# EAGLE board Glove-WiFi-M0-v0.2_pcb_opt (EAGLE 7.5.0)
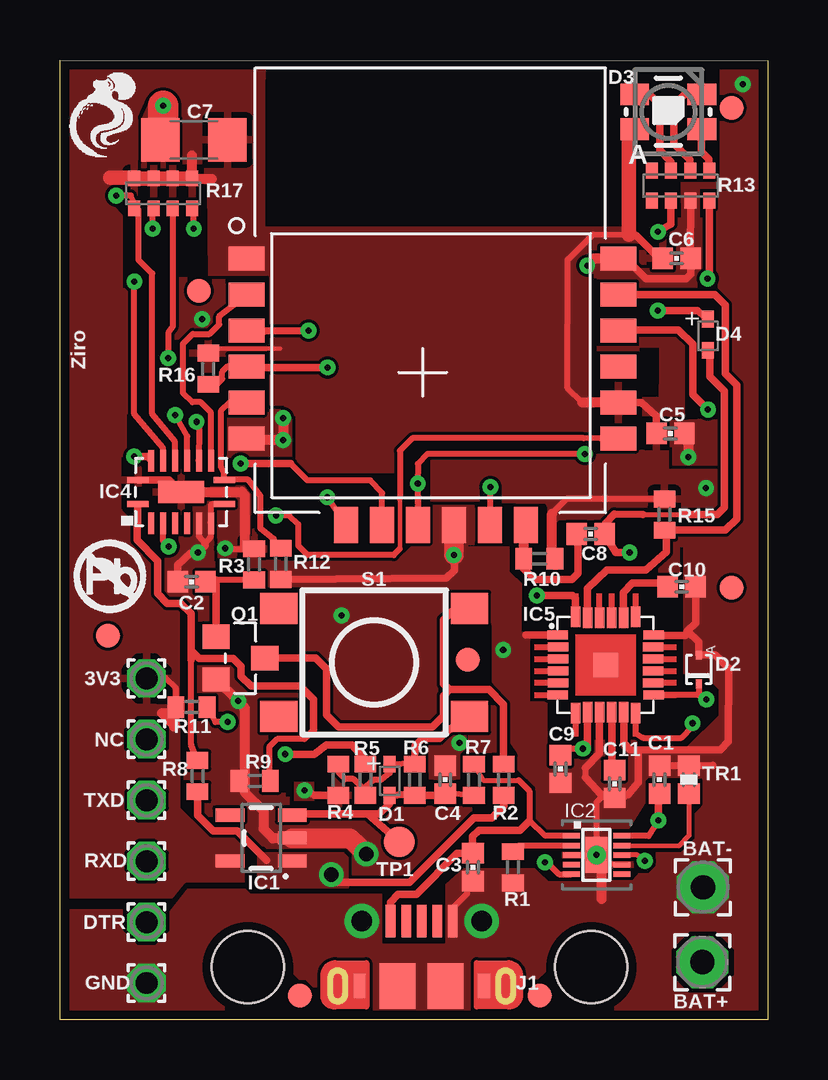
[diagram p0: board, top side]
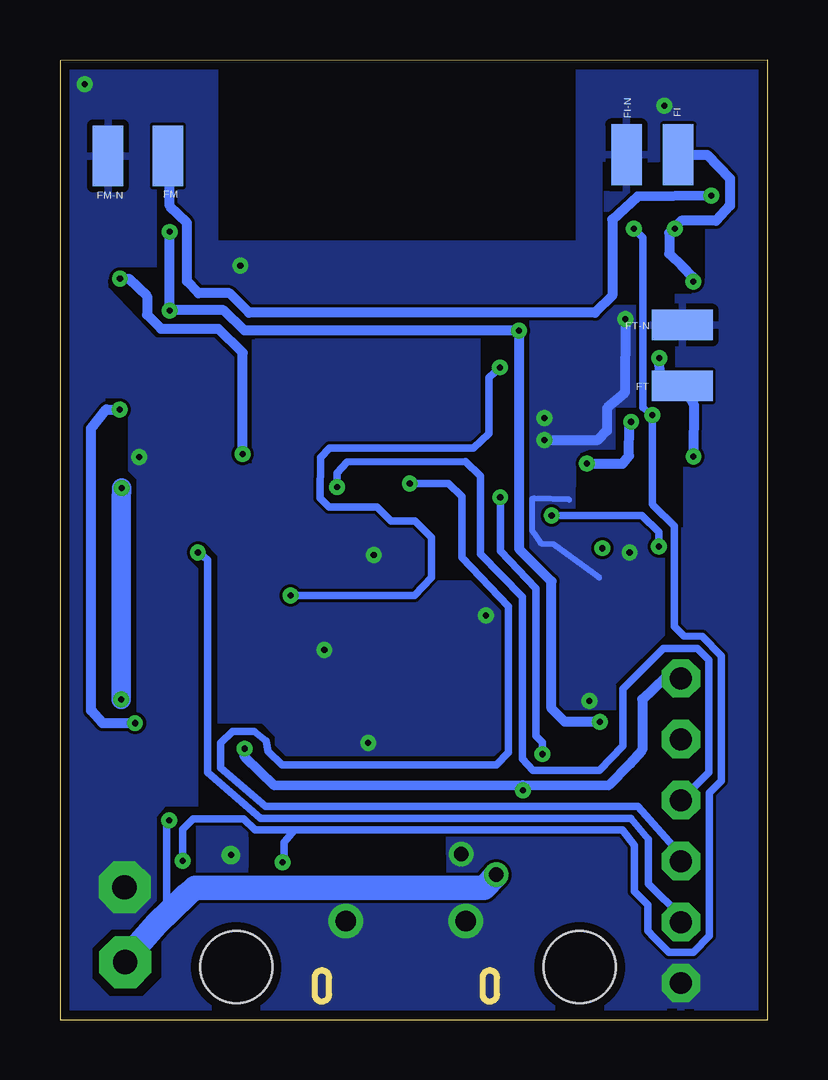
[diagram p1: board, bottom side, seen from below]

Size 29.5 x 40 mm. Coordinates in mm from the lower left corner, seen from the top.
Outline: 29.5,39.98 29.5,0 0,0 0,40 29.5,39.98
Copper layers (1*16): Top 0.035559375mm / dielectric 1.501140625mm / Bottom 0.035559375mm
Design rules "4pcb *": minimum track width 6mil, minimum drill 10mil, track to track 5mil, track to pad 5mil, pad to pad 5mil, via to via 5mil, smd to smd 5mil, copper to edge 15mil, drill to drill 8mil, minimum pad ring 10mil, minimum via ring 8mil, stop-mask expansion 4mil, vias tented up to drill 0mil, thermal gap 10mil
Holes 3 mm at 7.83,2.18 22.15,2.18
tKeepout: area 4.8,-0.8 to 10.8,5.2; area 19.1,-0.9 to 25.1,5.1
tRestrict: area 24.3,16.2 to 25.8,17.4; area 25.9,16.2 to 26,19.7; area 24.2,26.5 to 25,28; area 24,26 to 25,26.7; area 19.3,16.3 to 21.2,17.2; area 24.4,12.5 to 25.9,13.2; area 25.7,11.9 to 25.9,13.2; area 25.4,11.9 to 25.7,12; area 10.6,22.6 to 14,22.8; area 8.6,29.1 to 8.7,29.8; area 8.6,28.1 to 8.7,28.3; area 8.6,27.6 to 8.7,27.9; 20 more areas; 150 lines
bRestrict: area 13,18.3 to 13.7,19.8; area 12.4,18.3 to 12.9,18.6; area 8,32.5 to 22.9,39.8; 69 lines

## Footprints (pad centres in the part's own frame; a part is rotated, then mirrored left to right if it is on the bottom)
1,6/0,9 = drill 0.914 pad 1.6 octagon: 1 0,0
2,15/1,0 = drill 1.016 pad 2.159 octagon: 1 0,0
0402-CAP = smd 0.85 x 0.9: 1 -0.58,0; 2 0.58,0
1206 = smd 1.6 x 1.8: 1 -1.4,0; 2 1.4,0
SOD523 = smd 0.7 x 0.5: A 0.7,0; C -0.6,0
SOD-923 = smd 0.36 x 0.25: A -0.6,0; C 0.6,0
LED_RGB = smd 1.2 x 0.9: 1-RED 1.4,-0.725; 2-CA -1.4,-0.725; 3-BL -1.4,0.725; 4-GR 1.4,0.725
FIDUCIAL-1X2 = smd 1 x 1: 1 0,0
SMD1,27-2,54 = smd 1.27 x 2.54: 1 0,0
SOT23-5 = smd 0.55 x 1.2: 1 -0.95,-1.3; 2 0,-1.3; 3 0.95,-1.3; 4 0.95,1.3; 5 -0.95,1.3
BQ24040DSQR = smd 0.7 x 0.23: 1 -1.05,0.8; 2 -1.05,0.4; 3 -1.05,0; 4 -1.05,-0.4; 5 -1.05,-0.8; 6 1.05,-0.8; 7 1.05,-0.4; 8 1.05,0; 9 1.05,0.4; 10 1.05,0.8 | smd 0.914 x 1.499: 11 0,0 | drill 0.254 pad 0.508: V 0,0
WT8266 = smd 1.5 x 1: 1 -7.35,4.75; 2 -7.35,3.25; 3 -7.35,1.75; 4 -7.35,0.25; 5 -7.35,-1.25; 6 -7.35,-2.75; 13 8.15,-2.75; 14 8.15,-1.25; 15 8.15,0.25; 16 8.15,1.75; 17 8.15,3.25; 18 8.15,4.75 | smd 1 x 1.5: 7 -3.2,-6.35; 8 -1.7,-6.35; 9 -0.2,-6.35; 10 1.3,-6.35; 11 2.8,-6.35; 12 4.3,-6.35
DHVQFN16 = smd 0.24 x 0.9: 1 -0.5,1.8; 8 -0.5,-1.8; 9 0.5,-1.8; 16 0.5,1.8 | smd 0.9 x 0.24: 2 -1.3,1.25; 3 -1.3,0.75; 4 -1.3,0.25; 5 -1.3,-0.25; 6 -1.3,-0.75; 7 -1.3,-1.25; 10 1.3,-1.25; 11 1.3,-0.75; 12 1.3,-0.25; 13 1.3,0.25; 14 1.3,0.75; 15 1.3,1.25 | smd 0.9 x 1.9: EPAD 0,0
QFN.24.4X4 = smd 0.85 x 0.38: 1 -2.007,1.25; 2 -1.975,0.75; 3 -1.975,0.25; 4 -1.975,-0.25; 5 -1.975,-0.75; 6 -2.007,-1.25; 13 2.007,-1.25; 14 1.975,-0.75; 15 1.975,-0.25; 16 1.975,0.25; 17 1.975,0.75; 18 2.007,1.25 | smd 0.38 x 0.85: 7 -1.25,-2.007; 8 -0.75,-1.975; 9 -0.25,-1.975; 10 0.25,-1.975; 11 0.75,-1.975; 12 1.25,-2.007; 19 1.25,2.007; 20 0.75,1.975; 21 0.25,1.975; 22 -0.25,1.975; 23 -0.75,1.975; 24 -1.25,2.007 | smd 1.016 x 1.016: EPAD 0,0
USB-MICRO-MOLEX-105017-0001 = smd 0.4 x 1.35: 1 -1.3,1.3; 2 -0.65,1.3; 3 0,1.3; 4 0.65,1.3; 5 1.3,1.3 | drill 0.85 pad 1.45: G1 -2.5,1.3; G2 2.5,1.3 | smd 1.5 x 1.9: G3 1,-1.4; G4 -1,-1.4 | smd 0.5 x 1: G5 -2.6,-1.4; G6 2.6,-1.4
SOT-23 = smd 1.016 x 1.143: 1 -0.889,-1.016; 2 0.889,-1.016; 3 0,1.016
R0402 = smd 0.7 x 0.9: 1 -0.65,0; 2 0.65,0
0603-ARV = smd 0.5 x 0.65: 1 -1.2,-0.625; 2 -0.4,-0.625; 3 0.4,-0.625; 4 1.2,-0.625; 5 1.2,0.625; 6 0.4,0.625; 7 -0.4,0.625; 8 -1.2,0.625
TACTILE_SWITCH_TALL = smd 1.55 x 1.3: A1 -3.975,-2.25; A2 3.975,-2.25; B1 -3.975,2.25; B2 3.975,2.25
B1,27 = smd 1.27 x 1.27: TP 0,0
0402-RES = smd 0.85 x 0.9: 1 -0.58,0; 2 0.58,0

## Placement (x,y rotation side)
3V3  WIREPAD1,6/0,9  [1,6/0,9]  3.61,14.22 0 top
BAT+  WIREPAD2,15/1,0  [2,15/1,0]  26.78,2.39 90 top
BAT-  WIREPAD2,15/1,0  [2,15/1,0]  26.81,5.51 90 top
C1  10uF  [0402-CAP]  24.99,10 90 top
C2  10uF  [0402-CAP]  5.49,18.25 180 top
C3  0.1uF  [0402-CAP]  17.22,6.35 270 top
C4  10uF  [0402-CAP]  16.06,10 90 top
C5  0.1uF  [0402-CAP]  25.45,24.43 0 top
C6  10uF  [0402-CAP]  25.71,31.73 0 top
C7  100u  [1206]  5.58,36.67 180 top
C8  0.1uF  [0402-CAP]  22.12,20.24 0 top
C9  10nF  [0402-CAP]  20.86,10.44 270 top
C10  2.2nF  [0402-CAP]  25.92,18.04 0 top
C11  0.1uF  [0402-CAP]  23.12,9.82 270 top
D1  PMEG3005EB  [SOD523]  13.75,9.95 90 top
D2  ESD9X5  [SOD-923]  26.63,14.59 270 top
D3  [LED_RGB]  25.36,37.84 0 top
D4  PMEG3005EB  [SOD523]  27.02,28.5 90 top
DTR  WIREPAD1,6/0,9  [1,6/0,9]  3.61,4.06 0 top
FD1  FIDUCIAL1X2  [FIDUCIAL-1X2]  28,18 0 top
FD2  FIDUCIAL1X2  [FIDUCIAL-1X2]  10,1 0 top
FD3  FIDUCIAL1X2  [FIDUCIAL-1X2]  5.8,30.38 0 top
FD4  FIDUCIAL1X2  [FIDUCIAL-1X2]  28,38 0 top
FD5  FIDUCIAL1X2  [FIDUCIAL-1X2]  20,1 0 top
FD6  FIDUCIAL1X2  [FIDUCIAL-1X2]  17,15 0 top
FD8  FIDUCIAL1X2  [FIDUCIAL-1X2]  2,16 0 top
FI  WIREPADSMD1,27-254  [SMD1,27-2,54]  3.72,36.05 0 bottom
FI-N  WIREPADSMD1,27-254  [SMD1,27-2,54]  5.88,36.05 0 bottom
FM  WIREPADSMD1,27-254  [SMD1,27-2,54]  25,36 0 bottom
FM-N  WIREPADSMD1,27-254  [SMD1,27-2,54]  27.5,36 0 bottom
FT  WIREPADSMD1,27-254  [SMD1,27-2,54]  3.56,26.41 270 bottom
FT-N  WIREPADSMD1,27-254  [SMD1,27-2,54]  3.56,28.95 90 bottom
GND  WIREPAD1,6/0,9  [1,6/0,9]  3.61,1.52 0 top
IC1  AP2112K-3.3V  [SOT23-5]  8.39,7.57 90 top
IC2  BQ24040DSQR_BMS  [BQ24040DSQR]  22.37,6.86 0 top
IC3  WT8266  [WT8266]  15.12,26.97 0 top
IC4  74HC4051  [DHVQFN16]  5.05,21.99 90 top
IC5  MPU-6050  [QFN.24.4X4]  22.75,14.78 0 top
J1  Micro-USB  [USB-MICRO-MOLEX-105017-0001]  15.08,2.8 0 top
NC  WIREPAD1,6/0,9  [1,6/0,9]  3.61,11.68 0 top
Q1  2N7002-NMOS  [SOT-23]  7.53,15.06 270 top
R1  3k  [R0402]  18.89,6.35 90 top
R2  30k  [R0402]  18.5,10 270 top
R3  300k  [R0402]  8.09,18.97 90 top
R4  300k  [R0402]  11.61,10 90 top
R5  3k  [R0402]  12.74,10 90 top
R6  300k  [R0402]  14.79,10 90 top
R7  300k  [R0402]  17.26,10 270 top
R8  30k  [R0402]  5.74,10.15 270 top
R9  3k  [R0402]  8.12,9.95 0 top
R10  30k  [R0402]  19.98,19.21 0 top
R11  3k  [R0402]  5.49,13.03 180 top
R12  3k  [R0402]  9.21,19 90 top
R13  330E  [0603-ARV]  25.87,34.76 180 top
R15  3k  [R0402]  25.2,21.05 90 top
R16  3k  [R0402]  6.18,27.13 90 top
R17  300k  [0603-ARV]  4.3,34.43 0 top
RXD  WIREPAD1,6/0,9  [1,6/0,9]  3.61,6.6 0 top
S1  On/Off Sw  [TACTILE_SWITCH_TALL]  13.1,14.89 0 top
TP1  PTR1B1,27  [B1,27]  14.15,7.4 90 top
TR1  10kNTC  [0402-RES]  26.22,10 90 top
TXD  WIREPAD1,6/0,9  [1,6/0,9]  3.61,9.14 0 top
U$2  [NO_PB_LOGO_0.120]  0.36,16.58 0 top

## Library data of the parts
3V3 BAT+ BAT- DTR FI FI-N FM FM-N FT FT-N GND NC RXD TXD = wirepad
C1-C6 C8-C11 = 1_ZeroUI; PROD_ID: CAP-12416
C7 R13 R17 = SparkFun-Passives
D1 D4 = diode
D2 D3 IC3-IC5 J1 TR1 U$2 = 1_ZeroUI
FD1-FD6 FD8 = SparkFun-Aesthetics
IC1 = SparkFun-PowerIC; PROD_ID: VREG-12457
IC2 = 1_ZeroUI; 3D_LIBRARY_NAME: TI_AllParts_2012-12-25; COPYRIGHT: Copyright (C) 2015 Accelerated Designs. All rights reserved; DATASHEETURL: http://www.ti.com/lit/gpn/BQ24040; FAMILY_NAME: BATTERY CHARGE MANAGEMENT; GENERIC_PART_NUMBER: BQ24040; INDUSTRY_STD_PKG_TYPE: SON; MANUFACTURER: Texas Instruments; MANUFACTURER_PART_NUMBER: BQ24040DSQR; PACKAGE_DESIGNATOR: DSQ; PIN_COUNT: 10; VENDOR: Vendor
Q1 = 1_ZeroUI; MPN: 2N7002,215
R1-R12 R15 R16 = rcl
S1 = 1_ZeroUI; PROD_ID: SWCH-11966
TP1 = testpad

## Nets
3.3V: 3V3.1 C5.1 C6.1 C7.1 C9.1 D2.C D3.2-CA IC1.5 IC3.1 IC3.14 IC4.16 IC4.EPAD IC5.8 IC5.13 R3.2 R4.1 R10.2 R11.2 R15.2 R16.2 R17.5 R17.6 R17.7 R17.8
5V: C3.1 IC2.1 J1.1 R7.1
/POWEROFF_SWINT: IC3.7 R5.2
CHG_ON: IC2.5 IC2.8 IC4.12 R17.4
DTR: C8.2 D4.C DTR.1
GND: BAT-.1 C1.2 C2.2 C3.2 C4.2 C5.2 C6.2 C7.2 C9.2 C10.2 C11.2 D2.A FI-N.1 FM-N.1 FT-N.1 GND.1 IC1.2 IC2.3 IC2.7 IC2.11 IC2.V IC3.6 IC3.10 IC3.18 IC4.6 IC4.7 IC4.8 IC5.1 IC5.9 IC5.11 IC5.18 J1.5 J1.G1 J1.G2 J1.G3 J1.G4 J1.G5 J1.G6 Q1.2 R1.1 R9.1 R12.1 R13.7 TR1.2
I2C_N: IC3.4 IC5.24 R16.1
I2C_P: IC3.17 IC5.23 R15.1
MPU_INT: IC3.16 IC5.12
MUX_COM: IC3.13 IC4.3
MUX_S0: IC3.8 IC4.11
MUX_S1: IC3.2 IC4.10
MUX_S2: IC3.5 IC4.9 R12.2
N$1: FT.1 IC4.15 R17.3
N$2: C11.1 IC5.10
N$3: C10.1 IC5.20
N$4: FI.1 IC4.14 R17.2
N$5: FM.1 IC4.13 R17.1
N$6: D3.1-RED R13.1
N$7: D3.4-GR R13.2
N$8: D3.3-BL R13.3
N$9: C2.1 Q1.1 R3.1
N$10: IC2.2 R1.2
N$11: Q1.3 R2.1 S1.B2
N$12: D1.A R4.2 R5.1 R6.2 S1.A2
N$13: IC2.9 TR1.1
PROGL/LED-B: D4.A IC3.3 R11.1 R13.6
PWR_EN: C4.1 D1.C IC1.3 R6.1 R7.2 TP1.TP
RST: C8.1 IC3.12 R10.1
RXD/LED-R: IC3.9 R13.8 RXD.1
TXD: IC3.11 TXD.1
V_BATT: BAT+.1 C1.1 IC1.1 IC2.10 R2.2 R8.2
VBATT_SENSE: IC4.1 R8.1 R9.2

## Tracks (layer width: path | path; a pad name or v marks a point on that pad's centre or on a via)
3.3V  (via drill 0.25)
  Top 0.178: 6.35,27.97 9.18,27.97
  Top 0.254: 20.51,19.32 R10.2 20.67,19.22 20.57,19.23 | 20.51,21.09 21.14,21.71 R15.2 25.34,21.84 | 21.77,25.72 21.17,26.33 21.18,31.68 22.24,32.73 23.72,32.73 | 26.63,13.94 D2.C 26.63,13.53 | v26.95,13.35 26.63,13.53 | 26.63,13.53 IC5.13 | 21.98,12.69 IC5.8 | R11.2 4.84,13.82 4.41,14.25 3.64,14.25 3V3.1 | v6.89,19.65 6.88,19.62 R3.2 7.71,19.72 | IC3.1 7.58,31.72 7.77,31.76 | v21.81,11.29 21.14,11.29 C9.1 | R16.2 6.35,27.97
  Top 0.305: C6.1 25.12,31.59 24.02,32.68 23.72,32.73 | 23.72,37.13 D3.2-CA | 24.62,24.47 24.86,24.65 24.86,25.16 24.23,25.72 IC3.14 | 21.98,12.69 21.98,11.43 v21.81,11.29 | IC4.16 4.55,22.49 IC4.EPAD | v10.2,9.55 10.62,9.35 R4.1
  Top 0.406: 20.51,19.32 20.51,21.09 | IC3.14 21.77,25.72 | IC4.EPAD 7.59,21.99 7.7,21.85 7.71,19.72 | 6.34,35.05 R17.5 5.5,36.02 | R11.2 4.75,13.03 4.75,12.27 | 4.75,12.22 4.75,12.27 | 4.75,12.27 4.24,12.78 4.55,12.78 4.62,12.85
  Top 0.61: 23.72,32.73 23.72,37.13 | R17.5 R17.6 R17.7 R17.8 3.23,35.1 2.1,35.1
  Bottom 0.254: 3.64,14.25 3V3.1 3.6,14.21
  Bottom 0.406: 3.64,14.25 4.28,14.25 5.23,13.35 5.23,11.24 5.77,10.63 6.63,9.76 10.2,9.78 | 10.2,9.78 20.57,9.77 21.8,10.95 v21.81,11.29 | v10.2,9.55 10.2,9.78
  Bottom 0.813: v26.95,13.35 26.94,21.65 v26.93,22.16
  pour Top (rank 3): 15.01,5.84 15.04,11.45 8.95,11.45 8.98,20.15 29.58,20.15 29.58,33.15 8.95,33.15 8.95,39.86 -0.17,39.81 -0.17,4.93 4.45,4.98 5.16,5.84
  pour Top (rank 2, no thermals): 5.7,7.55 5.7,5.98 8.85,5.98 8.85,7.55
  pour Top (no thermals): 5.83,32.82 5.83,31.07 8.98,31.07 8.98,32.82
  pour Top (no thermals): 0.42,39.6 0.42,34.6 1.36,34.6 4.42,37.66 4.42,39.6
5V
  Top 0.203: 17.26,10.6 17.65,9.97 19.13,9.97
  Top 0.254: IC2.1 20.23,7.66 19.57,8.29 19.57,9.53 19.13,9.97 | R7.1 17.26,10.6 | 17.21,6.94 C3.1
  Top 0.305: 19.57,8.29 19.17,7.89 17.47,7.89 17.21,7.63 17.21,6.94 | C3.1 16.56,6.92 14.85,5.21 14.1,5.21 13.78,4.89 J1.1
/POWEROFF_SWINT  (via drill 0.25)
  Top 0.254: v11.15,21.77 11.6,21.11 11.61,20.6 IC3.7 | R5.2 12.87,10.66
  Top 0.305: 12.87,10.66 12.17,11.45 11.12,11.45 10.6,11.06 v9.39,11.06
  Bottom 0.254: 9.39,11.16 v9.39,11.06
  Bottom 0.305: v11.15,21.77 11.15,19.54 9.66,17.96 9.66,11.81 9.39,11.55 9.39,11.16
CHG_ON  (via drill 0.25)
  Top 0.203: 24.41,6.63 24.07,6.86 IC2.8
  Top 0.254: v24.38,6.62 24.41,6.63 | v5.58,32.97 5.58,33.74 R17.4 | IC4.12 5.31,24.31 v4.8,25.2 | 20.3,6.55 20.81,6.06 IC2.5
  Top 0.305: 20.3,6.55 v20.22,6.55
  Bottom 0.254: v20.22,6.55 20.17,6.6 | 4.99,3.7 4.96,3.68
  Bottom 0.305: 20.17,6.6 20.17,7.38 19.71,7.9 | 19.71,7.9 6.05,7.9 5.55,7.27 5.55,5.35 4.99,4.78 4.99,3.7 | 4.96,3.68 4.76,3.45 4.11,2.81 3.09,2.79 2.43,3.49 2.43,9.46 1.93,9.95 1.93,15.16 2.72,15.97 3.49,15.98 3.9,16.39 3.9,20.58 4.73,21.41 4.8,21.49 v4.8,25.2 5.21,25.5 5.21,32.6 v5.58,32.97 | v24.38,6.62 24.38,7.93 23.95,8.36 21.85,8.36 21.37,7.9 19.71,7.9
DTR  (via drill 0.25)
  Top 0.203: 24.3,21.06 26.01,21.05
  Top 0.254: 27.09,27.57 D4.C
  Top 0.305: 24.3,21.06 23.12,21.06 22.74,20.68 C8.2 23.17,19.47 v23.75,19.48 | 26.01,21.05 27.4,21.04 27.7,21.34 27.7,26.2 27.09,26.8 27.09,27.57
  Bottom 0.254: DTR.1 3.59,4.29 | 23.69,19.46 v23.75,19.48
  Bottom 0.305: 3.59,4.29 4.96,5.66 4.96,7.51 5.7,8.38 21.13,8.38 23.35,10.3 23.35,19.16 23.69,19.46
GND  (via drill 0.25, 0.61)
  Top 0.203: IC2.7 22.58,6.46
  Top 0.254: 24.54,16.02 IC5.18 | 23.26,31.73 IC3.18 23.59,31.72 | 23.52,9.31 C11.2 | IC5.11 | 22.58,6.46 IC2.V | J1.5 16.38,4.65 16.99,5.25 16.99,6.11 | 5.44,19.45 v5.75,19.45 | IC4.7 6.3,20.67 | IC4.7 6.3,20.14 6.05,19.84 5.8,20.14 IC4.6 | IC3.10 16.42,20.21 | 21.91,10.49 21.91,10.09 | C6.2 | 6.28,20.71 IC4.7 | 8.57,24.16 IC3.6 | C5.2 26.2,24.02 | 22.62,9.31 22.37,9.06 IC2.V | IC2.3 IC2.V | IC4.7 6.3,21.48 IC4.8 | 9.67,7.55 IC1.2
  Top 0.305: C6.2 26.3,34.23 R13.7 | C10.2 26.5,16.54 26.17,16.2 | 26.17,16.2 26.07,16.02 24.54,16.02 | 26.17,16.2 26.63,15.74 D2.A 27.33,15.19 27.88,14.64 27.87,11.6 27.52,11.25 24.08,11.25 | C11.2 23.28,9.37 23.69,9.37 24.11,9.89 24.11,11.23 24.08,11.25 | 24.08,11.25 23.79,11.25 23.51,11.53 IC5.11 | IC5.9 22.5,11.08 21.91,10.49 | C2.2 4.91,18.94 5.44,19.45 v5.75,19.46 | v5.75,19.45 6.05,19.75 6.05,19.84 | 21.91,10.09 22.39,9.58 22.62,9.31 23.52,9.31 | 23.59,31.72 24.42,30.89 26.12,30.89 26.3,31.07 C6.2 | 19.43,16.02 19.73,16.03 IC5.1 | R12.1 16.12,18.4 16.44,18.73 16.44,19.34 v16.42,19.36 | TR1.2 27.23,10.59 C1.2
  Top 0.406: 22.58,6.46 22.58,5.01 | 8.57,24.16 v9.31,24.16 v9.3,25.08 | 26.2,24.02 v26.2,23.45 | Q1.2 v7.44,13.28 7.71,12.99 7.71,9.98 | IC3.18 22.27,31.72 v21.98,31.43 | 7.71,9.98 R9.1 | 7.71,9.98 7.71,9.47 8.48,8.7 8.48,7.95 8.88,7.55 9.67,7.55
  Top 0.813: v16.42,19.36 IC3.10 | v12.78,6.9 12.09,7.54 9.67,7.55
  Top 1.27: C7.2 4.3,36.57 v4.3,38.1
  Bottom 0.254: FT-N.1 2.73,28.95 | 8.27,21.67 9.74,21.72 9.82,21.7 9.82,20.38 9.46,19.84 8.93,19.82 7.02,18.42
  Bottom 0.406: v9.31,24.16 7.07,24.16 6.69,24.54 6.69,25.48 5.95,26.12 v5.93,29.2
  other vias: 18.48,15.41 11.74,16.84 16.65,11.52 28.47,38.99
  pour Bottom (rank 6): -1.02,40.95 30.22,41.01 30.22,0.01 -1.02,-0.05
  pour Top (rank 3, no thermals): 9.57,4.81 19.97,4.74 20.04,-0.17 9.59,0.11
  pour Bottom (no thermals): 5.12,2.55 5.12,0.62 1.79,0.54 1.81,2.62
  pour Bottom (no thermals): 25.51,8.31 28.76,8.31 28.76,4.12 25.51,4.12
  pour Top (rank 5, no thermals): 1.98,40.95 31.98,40.95 32.65,-1.47 -0.26,-1.29 0.07,41.13
  pour Bottom (no thermals): 21.65,8.11 23.33,8.11 23.33,5.65 21.65,5.65
  pour Bottom (isolate 0.025, no thermals): 10.95,5 10.95,-0.08 19.2,-0.08 19.2,5.13 10.92,5.13
I2C_N  (via drill 0.25)
  Top 0.254: 8.54,27.18 IC3.4 7.76,27.24 7,27.24 6.77,27.01 6.77,26.7 6.54,26.48 R16.1
  Top 0.305: v19.89,17.68 21.37,17.68 21.5,17.55 IC5.24 | v11.16,27.18 8.54,27.18
  Bottom 0.305: v19.89,17.68 14.71,17.68 14.01,18.42 14.01,20.1 14.69,20.79 15.71,20.79 16.29,21.37 18.27,21.37 18.65,21.75 18.64,23.42 18.26,23.82 12.25,23.82 11.62,24.43 11.62,26.75 v11.16,27.18
I2C_P
  Top 0.254: 25.28,20.06 25.27,20.36 R15.1
  Top 0.305: IC5.23 22,17.96 22.79,18.75 24.42,18.75 25.28,19.49 25.28,20.06 | R15.1 27.75,20.4 28.22,20.86 28.22,26.45 27.75,26.93 27.75,29.79 27.31,30.23 IC3.17
MPU_INT  (via drill 0.25)
  Top 0.254: IC5.12 24,11.96 24.31,11.75 25.91,11.75 26.37,12.21 v26.37,12.35 | 23.3,28.75 IC3.16
  Top 0.305: v27.02,25.43 26.38,26.04 26.38,28.15 25.78,28.75 23.3,28.75
  Bottom 0.406: v26.37,12.35 27.72,12.35 28.2,12.88 28.2,24.64 27.57,25.43 v27.02,25.43
MUX_COM  (via drill 0.25)
  Top 0.178: 14.17,21.72 14.17,19.63
  Top 0.254: IC3.13 22.52,24.22 21.83,24.24 14.69,24.24 14.17,23.72 14.17,21.72 | 14.17,19.63 13.91,19.36 10.32,19.36 9.94,19.74 9.94,20.64 9.56,21.02 v9,21.01 | v4.53,19.72 4.3,19.92 IC4.3
  Bottom 0.254: v9,21.01 8.64,21.02
  Bottom 0.305: 8.64,21.02 5.24,21.02 4.53,20.32 v4.53,19.72
MUX_S0  (via drill 0.25)
  Top 0.254: IC3.8 13.43,21.94 12.93,22.47 10.32,22.47 9.62,23.18 | v5.69,24.92 5.79,24.61 5.78,23.31 IC4.11
  Top 0.305: 9.62,23.18 v7.53,23.18
  Bottom 0.254: 5.77,24.78 v5.69,24.92
  Bottom 0.406: v7.53,23.18 6.04,23.18 5.78,23.49 5.77,24.78
MUX_S1
  Top 0.254: IC4.10 6.3,25.3 5.87,25.73 5.52,25.73 5.13,26.12 5.13,28.17 5.54,28.57 6.25,28.57 6.64,28.97 6.64,29.32 7.71,30.16 IC3.2
MUX_S2
  Top 0.254: IC3.5 7.46,25.75 7.1,25.75 6.73,25.39 6.73,23.02 6.85,22.78 IC4.9 6.84,22.5 7.85,22.5 8.36,21.83 8.36,20.48 8.92,20.04 8.93,19.7 R12.2
N$1  (via drill 0.25)
  Top 0.254: R17.3 4.7,31.42 4.7,28.89 4.51,28.63 v4.51,27.58 | 3.62,23.47 IC4.15
  Top 0.305: v3.09,23.47 3.62,23.47
  Bottom 0.254: 3.52,26.45 FT.1 4.5,26.83
  Bottom 0.406: FT.1 3.08,25.65 v3.09,23.47 | 4.5,26.83 v4.51,27.58
N$2
  Top 0.254: C11.1 23.02,10.6 | 23.01,12.69 IC5.10
  Top 0.305: 23.02,10.6 23.01,11.33 23.01,12.69
N$3
  Top 0.254: 23.5,16.61 IC5.20
  Top 0.305: C10.1 25.23,18.04 25.08,18.19 23.87,18.19 23.5,17.81 23.5,16.61
N$4  (via drill 0.25)
  Top 0.254: IC4.14 4.3,23.83 3.1,25.24 v3.1,30.77 | v3.87,32.97 3.87,33.83 R17.2
  Bottom 0.406: v3.1,30.77 3.11,30.95 3.56,31.4 4.1,31.92 4.1,32.8 3.91,32.99 | FI.1 2.52,36.05 1.57,35.06 1.57,33.92 2.14,33.3 3.6,33.3 3.91,32.99 | v3.87,32.97 3.91,32.99
N$5  (via drill 0.25)
  Top 0.254: IC4.13 4.8,24.09 3.85,25.23 3.85,31.1 3.28,31.66 3.28,33.74 R17.1 3.22,33.8 2.95,34.35 v2.35,34.35
  Bottom 0.406: v2.35,34.35 5.42,34.31 6.48,33.35 6.48,30.18 7.19,29.46 21.62,29.46 22.43,30.28 23.73,30.28 24.21,30.78 24.21,33.21 24.92,33.91 24.92,36.92 FM.1
N$6
  Top 0.305: R13.1 27.06,35.86 26.74,36.18 26.75,37.1 D3.1-RED
N$7
  Top 0.305: D3.4-GR 26.05,38.56 25.59,38.11 25.59,36.51 26.26,35.84 R13.2
N$8
  Top 0.305: R13.3 25.47,35.76 25,36.23 25,38.14 24.59,38.55 23.98,38.55 D3.3-BL
N$9
  Top 0.254: R3.1 6.46,18.32 5.81,18.38 C2.1
  Top 0.305: Q1.1 6.51,18.32 6.46,18.32
N$10
  Top 0.254: IC2.2 19.13,7.26 18.95,7.18 18.96,7.08 18.99,6.99 R1.2
N$11
  Top 0.254: S1.B2 16.97,17.14
  Top 0.305: 16.25,13.76 17.88,13.76 18.5,13.13 R2.1 | Q1.3 10.66,15.06 11.11,14.61 11.11,12.71 11.61,12.2 14.37,12.2 14.57,12.2 15.52,12.2 15.98,12.65 15.98,13.49 16.25,13.76 | 16.97,17.14 16.46,17.14 15.98,16.65 15.98,13.99 16.25,13.76
N$12
  Top 0.254: 16.84,12.51 S1.A2 | R6.2 14.78,10.7 D1.A 13.74,10.28 13.39,9.99 13.08,9.99 12.74,9.69 R5.1 12.74,9.53 12.24,10.02 11.89,10.02 11.62,10.29 11.62,10.82 R4.2 11.35,10.81
  Top 0.305: R6.2 14.8,11.4 15.11,11.72 15.83,11.72 16.08,11.97 16.84,12.51
N$13
  Top 0.203: IC2.9 25.8,7.25 26.22,7.67 26.22,9.37
  Top 0.305: TR1.1 26.22,9.37
PROGL/LED-B  (via drill 0.25)
  Top 0.254: v6.99,12.41 6.49,12.4 R11.1
  Top 0.305: R13.6 25.47,33.15 v24.94,32.84 | v10.36,28.72 8.53,28.7 IC3.3 | D4.A 26.58,29.55 v24.93,29.55
  Bottom 0.254: 24.93,32.71 24.83,32.81
  Bottom 0.305: v24.94,32.84 24.83,32.81
  Bottom 0.406: 24.93,32.71 v24.93,29.55 24.91,29.57 22.68,29.57 21.81,28.72 v10.36,28.72 10.36,19.62 9,18.27 9,12.96 8.45,12.41 v6.99,12.41
PWR_EN
  Top 0.254: D1.C 13.74,9.38 | 14.78,9.4 R6.1 | 16.06,9.35 C4.1 17.27,9.38 R7.2 | IC1.3 10.28,8.58
  Top 0.305: 13.74,9.38 13.74,8.99 13.31,8.58 | D1.C 14.78,9.4 | R6.1 16.06,9.35 | 13.31,8.58 10.28,8.58 | TP1.TP 12.82,8.57 13.31,8.58
RST
  Top 0.254: 19.32,20.91 19.25,20.55 19.42,20.58 IC3.12 | 21.6,19.93 C8.1
  Top 0.305: R10.1 19.33,18.81 19.8,18.34 21.35,18.34 21.6,18.59 21.6,19.93
  Top 0.406: R10.1 19.32,20.91
RXD/LED-R  (via drill 0.25)
  Top 0.254: 27.07,30.8 v27,30.88 | v21.89,23.58 15.33,23.58 14.92,23.16 v14.92,22.35 | v14.92,22.35 IC3.9 14.92,21.39 v14.92,22.35
  Top 0.305: R13.8 27.07,30.8
  Bottom 0.305: RXD.1 3.62,6.86 5.41,8.89 20.92,8.89 22.8,10.49 22.81,11.53 22.31,12 21.42,12 20.9,11.62 20.82,11.17 20.25,10.61 11.31,10.61 10.8,11.14 10.8,17.22 12.75,19.27 12.75,21.8 13.3,22.35 v14.92,22.35
  Bottom 0.406: v27,30.88 26.63,30.88 25.87,30.15 25.87,29.38 25.29,28.8 22.91,28.8 21.89,27.8 v21.89,23.58
TXD  (via drill 0.25)
  Top 0.254: v17.95,22.19 17.92,22.04 IC3.11
  Bottom 0.305: TXD.1 2.45,10.3 2.45,14.99 2.93,15.48 4.35,15.48 6.03,13.77 6.03,11.41 7.01,10.39 9.77,10.39 10.22,10.86 10.22,17.61 11.97,19.41 11.97,22.66 12.6,23.26 17.53,23.24 17.95,22.78 v17.95,22.19
V_BATT  (via drill 0.25, 0.61)
  Top 0.254: v24.94,8.3 24.53,7.65 23.53,7.66 IC2.10 | IC1.1
  Top 0.305: R2.2 18.5,8.9 18.02,8.41 17.26,8.41 14.57,5.71 13.57,5.71 11.4,5.72 | 8.61,6.63 7.38,7.86 6.39,7.86 5.74,8.51 R8.2 | v24.94,8.3 24.94,8.98 C1.1
  Bottom 0.305: 23.87,5.49 25.06,4.96 25.06,8.1 24.95,8.28
  Bottom 0.406: 24.95,8.28 v24.94,8.3
  Bottom 1.016: BAT+.1 26.63,2.66 25.46,3.98 24.23,5.18 23.87,5.49 11.82,5.49 v11.31,6.03
  pour Top (no thermals): 8.33,7.01 8.33,5.54 11.94,5.54 11.97,7.09 8.32,7.09
VBATT_SENSE
  Top 0.254: 3.24,21.45 IC4.1 | 5.48,15.4 5.47,15.38 | 10.58,12.07 10.2,11.69 9.05,11.69 8.72,11.36 8.72,10.34 R9.2 | R8.1 5.47,11.46 5.47,14.99
  Top 0.305: 3.24,21.45 3.23,21.17 3.22,19.98 4.08,19.12 4.08,17.75 4.47,17.35 5.04,17.35 5.48,16.93 5.48,15.4 | 10.58,12.07 10.58,13.34 10.02,13.9 7.96,13.9 7.55,14.31 7.55,14.71 7.22,15.04 5.81,15.04 5.47,15.38 5.47,14.99

## Text on the board
tPlace: Ziro
tCream: tCream | Glove WiFi v0.2